# EAGLE board dual_encoder_i2c_revF (EAGLE 8.6.0)
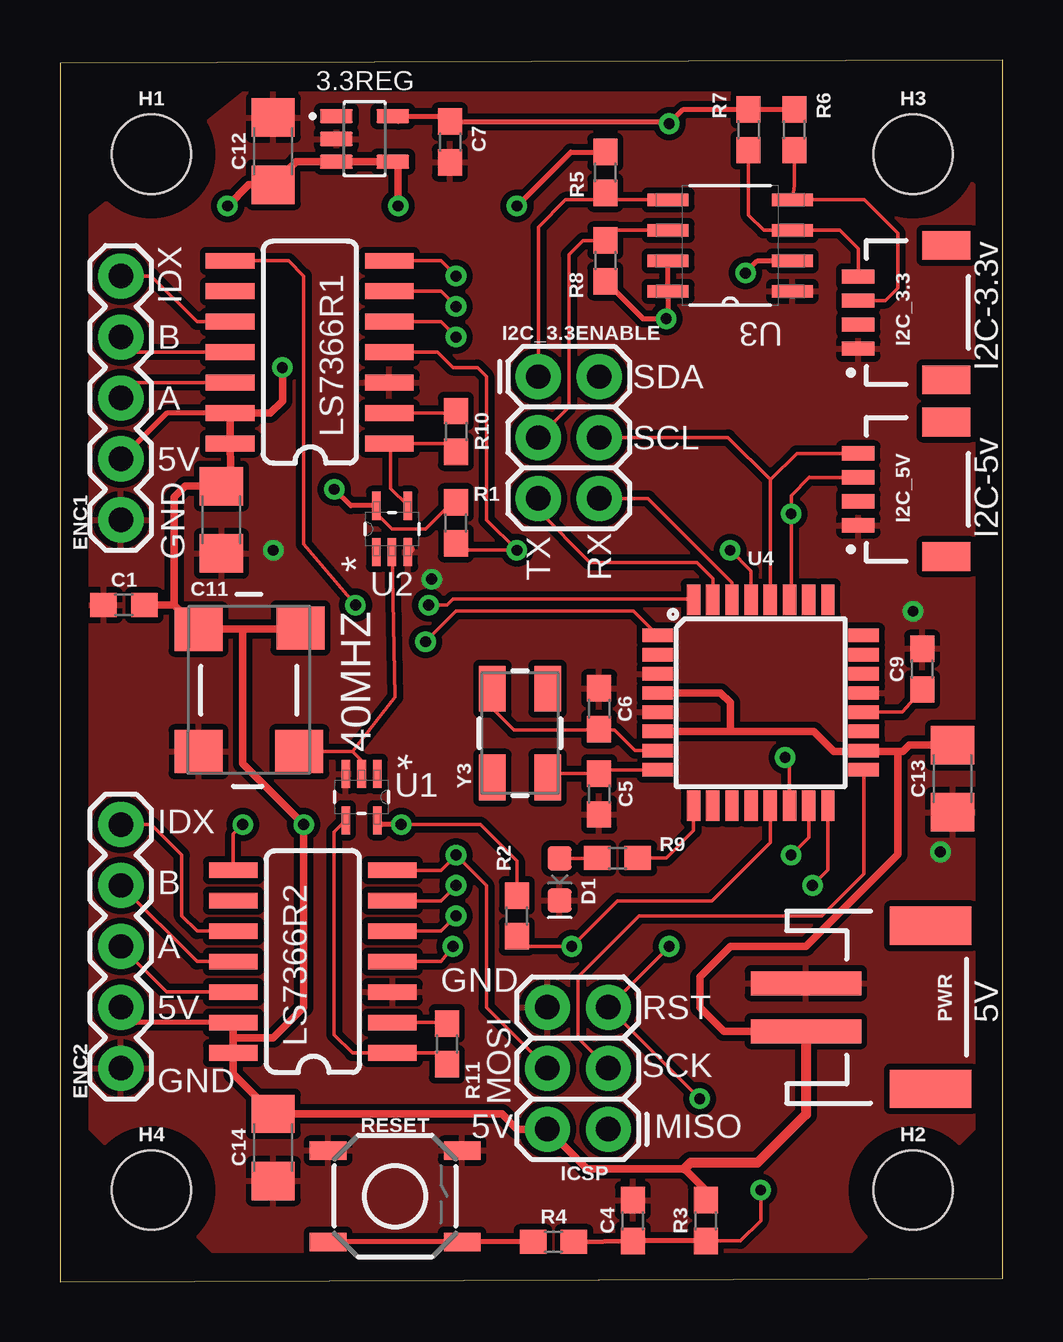
[diagram p0: board, top side]
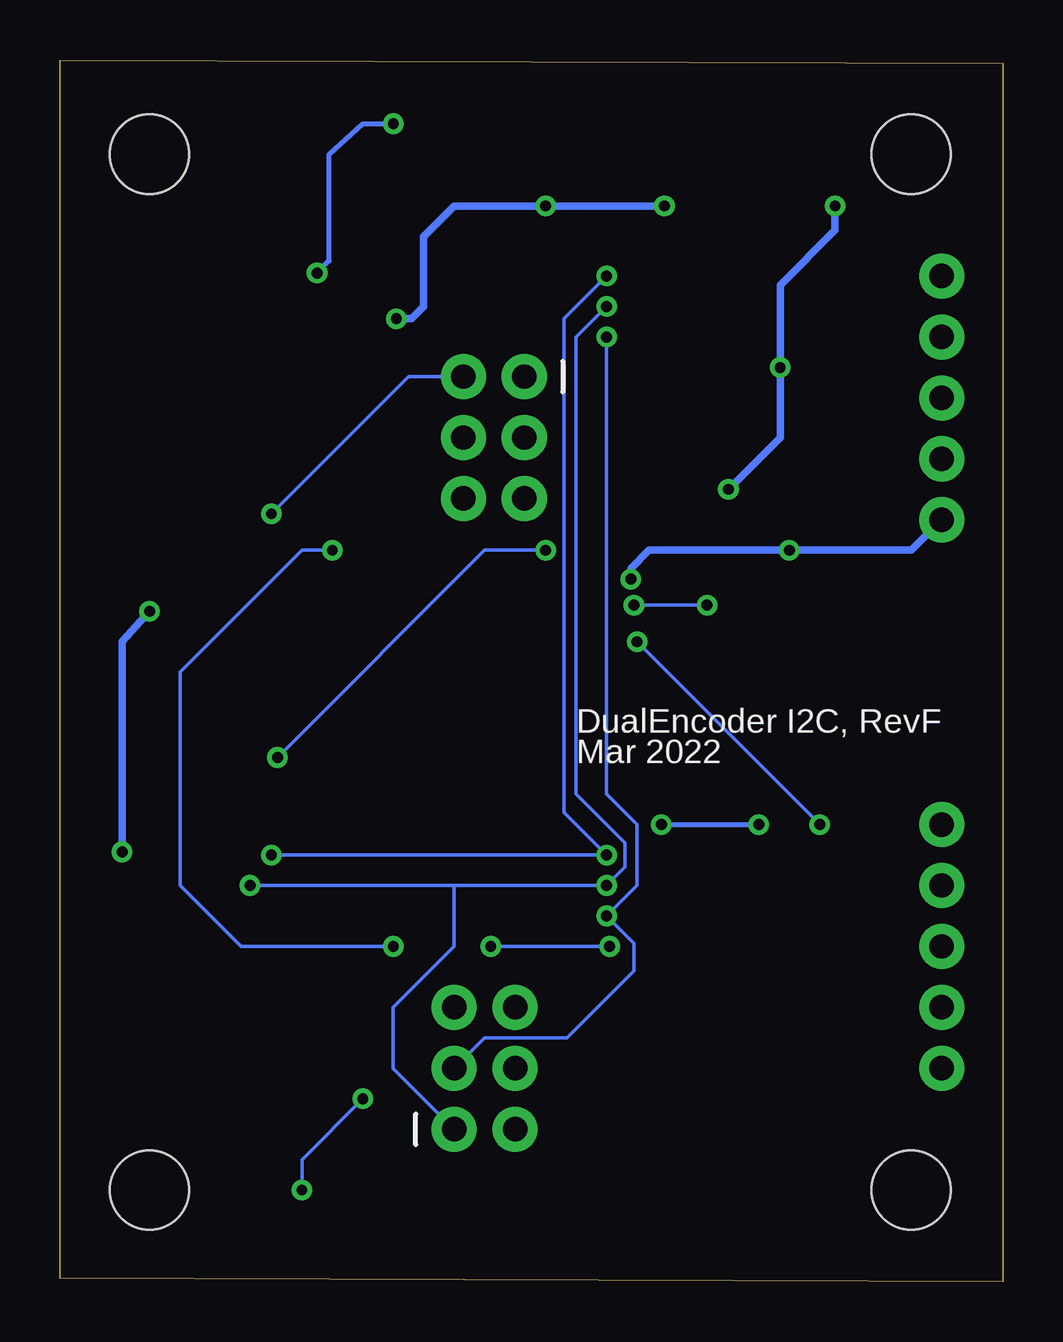
[diagram p1: board, bottom side, seen from below]

Size 39.29 x 50.92 mm. Coordinates in mm from the lower left corner, seen from the top.
Outline: 0,0 39.29,0.13 39.29,50.92 0,50.79 0,0
Copper layers (1*16): Top 0.035mm / dielectric 1.5mm / Bottom 0.035mm
Design rules "default": minimum track width 6mil, minimum drill 0.35mm, track to track 6mil, track to pad 6mil, pad to pad 6mil, via to via 6mil, smd to smd 6mil, copper to edge 40mil, drill to drill 6mil, minimum pad ring 10mil, minimum via ring 8mil, stop-mask expansion 4mil, vias tented up to drill 0mil, thermal gap 10mil

## Footprints (pad centres in the part's own frame; a part is rotated, then mirrored left to right if it is on the bottom)
SOT95P285X145-5N = smd 1.37 x 0.59: 1 -1.175,0.95; 2 -1.175,0; 3 -1.175,-0.95; 4 1.175,-0.95; 5 1.175,0.95
CB3OSCILLATOR = smd 1.8 x 2: 1 -2.55,-2.1; 2 2.55,-2.1; 3 2.55,2.1; 4 -2.6,2.15
0603 = smd 1.1 x 1: 1 -0.85,0; 2 0.85,0
1206 = smd 1.6 x 1.8: 1 -1.4,0; 2 1.4,0
LED-0603 = smd 1 x 1: A -0.877,0; C 0.877,0
1X05 = drill 1.016 pad 1.88: 1 0,0; 2 2.54,0; 3 5.08,0; 4 7.62,0; 5 10.16,0
STAND-OFF = hole 3.302: 0,0
JST04_1MM_RA = smd 0.6 x 1.35: 1 -1.5,0; 2 -0.5,0; 3 0.5,0; 4 1.5,0 | smd 1.2 x 2: NC1 2.8,-3.675; NC2 -2.8,-3.675
2X3 = drill 1.016 pad 1.88: 1 0,0; 2 0,2.54; 3 2.54,0; 4 2.54,2.54; 5 5.08,0; 6 5.08,2.54
SOIC14 = smd 2.032 x 0.66: 1 -3.315,4.445; 2 -3.315,3.175; 3 -3.315,1.905; 4 -3.315,0.635; 5 -3.315,-0.635; 6 -3.315,-1.905; 7 -3.315,-3.175; 8 3.315,-3.175; 9 3.315,-1.905; 10 3.315,-0.635; 11 3.315,0.635; 12 3.315,1.905; 13 3.315,3.175; 14 3.315,4.445
JST-2-SMD = smd 1 x 4.6: 1 -1,-3.7; 2 1,-3.7 | smd 1.6 x 3.4: NC1 -3.4,1.5; NC2 3.4,1.5
TACTILE_SWITCH_SMD_5.2MM = smd 1.524 x 0.762: 1 -2.794,1.905; 2 2.794,1.905; 3 -2.794,-1.905; 4 2.794,-1.905
SOT65P210X110-5N = smd 1.168 x 0.356: 1 -0.965,0.66; 2 -0.965,0; 3 -0.965,-0.66; 4 0.965,-0.66; 5 0.965,0.66
SOIC127P600X175-8N = smd 1.702 x 0.533: 1 -2.591,1.905; 2 -2.591,0.635; 3 -2.591,-0.635; 4 -2.591,-1.905; 5 2.591,-1.905; 6 2.591,-0.635; 7 2.591,0.635; 8 2.591,1.905
TQFP32-08 = smd 1.27 x 0.559: 1 -4.293,2.8; 2 -4.293,2; 3 -4.293,1.2; 4 -4.293,0.4; 5 -4.293,-0.4; 6 -4.293,-1.2; 7 -4.293,-2; 8 -4.293,-2.8; 17 4.293,-2.8; 18 4.293,-2; 19 4.293,-1.2; 20 4.293,-0.4; 21 4.293,0.4; 22 4.293,1.2; 23 4.293,2; 24 4.293,2.8 | smd 0.559 x 1.27: 9 -2.8,-4.293; 10 -2,-4.293; 11 -1.2,-4.293; 12 -0.4,-4.293; 13 0.4,-4.293; 14 1.2,-4.293; 15 2,-4.293; 16 2.8,-4.293; 25 2.8,4.293; 26 2,4.293; 27 1.2,4.293; 28 0.4,4.293; 29 -0.4,4.293; 30 -1.2,4.293; 31 -2,4.293; 32 -2.8,4.293
CRYSTAL-SMD-5X3.2-4PAD = smd 1.9 x 1.1: 1 -1.85,-1.15; 2 1.85,-1.15; 3 1.85,1.15; 4 -1.85,1.15

## Placement (x,y rotation side)
3.3REG  [SOT95P285X145-5N]  12.7,47.62 0 top
40MHZ  OSC  [CB3OSCILLATOR]  7.87,24.64 270 top
C1  100pF  [0603]  2.67,28.19 0 top
C4  0.1uF  [0603]  23.88,2.54 90 top
C5  22pF  [0603]  22.48,20.32 90 top
C6  22pF  [0603]  22.48,23.88 270 top
C7  2.2uF  [0603]  16.26,47.5 270 top
C9  0.1uF  [0603]  35.94,25.53 90 top
C11  4.7uF  [1206]  6.73,31.75 270 top
C12  4.7uF  [1206]  8.89,47.12 90 top
C13  4.7uF  [1206]  37.21,20.95 90 top
C14  4.7uF  [1206]  8.89,5.59 90 top
D1  LED  [LED-0603]  20.83,16.76 270 top
ENC1  [1X05]  2.54,31.75 90 top
ENC2  [1X05]  2.54,8.89 90 top
H1  STAND-OFF  [STAND-OFF]  3.81,46.99 0 top
H2  STAND-OFF  [STAND-OFF]  35.56,3.81 0 top
H3  STAND-OFF  [STAND-OFF]  35.56,46.99 0 top
H4  STAND-OFF  [STAND-OFF]  3.81,3.81 0 top
I2C_3.3  [JST04_1MM_RA]  33.27,40.39 90 top
I2C_3.3ENABLE  FEMALE 2x3  [2X3]  19.94,37.72 270 top
I2C_5V  [JST04_1MM_RA]  33.27,33.02 90 top
ICSP  FEMALE 2x3  [2X3]  22.86,6.35 90 top
LS7366R1  LS7366R  [SOIC14]  10.41,39.37 180 top
LS7366R2  LS7366R  [SOIC14]  10.54,13.97 180 top
PWR  [JST-2-SMD]  34.8,11.43 270 top
R1  1k  [0603]  16.51,31.62 90 top
R2  1k  [0603]  19.05,15.24 90 top
R3  10k  [0603]  26.92,2.54 90 top
R4  1k  [0603]  20.57,1.65 0 top
R5  2.2k  [0603]  22.73,46.23 90 top
R6  2.2k  [0603]  30.61,48.01 90 top
R7  2.2k  [0603]  28.7,48.01 270 top
R8  2.2k  [0603]  22.73,42.55 270 top
R9  1k  [0603]  23.24,17.65 180 top
R10  1M  [0603]  16.51,35.43 270 top
R11  1M  [0603]  16.13,9.91 270 top
RESET  [TACTILE_SWITCH_SMD_5.2MM]  13.97,3.56 0 top
U1  74LVC1G14GW  [SOT65P210X110-5N]  12.57,20.19 270 top
U2  74LVC1G14GW  [SOT65P210X110-5N]  13.84,31.37 90 top
U3  PCA9306D,118  [SOIC127P600X175-8N]  27.94,43.18 180 top
U4  ATMEGA328P_TQFP  [TQFP32-08]  29.21,24.13 0 top
Y3  16MHz  [CRYSTAL-SMD-5X3.2-4PAD]  19.18,22.86 90 top

## Library data of the parts
3.3REG 40MHZ = steveo
C1 = SparkFun-Capacitors; PROD_ID: CAP-07883
C4 C9 = SparkFun-Capacitors; PROD_ID: CAP-08604
C5 C6 = SparkFun-Capacitors; PROD_ID: CAP-07876
C7 = SparkFun-Capacitors; PROD_ID: CAP-07888
C11-C14 = SparkFun-Capacitors; PROD_ID: CAP-10300
D1 = SparkFun-LED
ENC1 ENC2 = SparkFun-Connectors
H1-H4 = SparkFun-Hardware
I2C_3.3 I2C_5V = SparkFun-Connectors; PROD_ID: CONN-13694
I2C_3.3ENABLE ICSP = SparkFun-Connectors; PROD_ID: CONN-11566
LS7366R1 LS7366R2 = LS7366R; AVAILABILITY: Unavailable; MF: LSI; MP: LS7366R; PACKAGE: None; PRICE: None
PWR = SparkFun-Connectors; PROD_ID: CONN-11443
R1 R2 R4 R9 = SparkFun-Resistors; PROD_ID: RES-07856
R3 = SparkFun-Resistors; PROD_ID: RES-00824
R5-R8 = SparkFun-Resistors; PROD_ID: RES-08272
R10 R11 = SparkFun-Resistors; PROD_ID: RES-07868
RESET = SparkFun-Switches; PROD_ID: SWCH-08247; SF_SKU: COM-08720
U1 U2 = 74LVC1G14GW; AVAILABILITY: Unavailable; DESCRIPTION: IC MOS 74LVC1G14/SO/74LVC1G14GW PHILIPS RoHS LVC SOt23; MF: NXP Semiconductors; MP: 74LVC1G14GW; PACKAGE: TSSOP-5 NXP Semiconductors; PRICE: 214.47 USD
U3 = PCA9306D_118; AVAILABILITY: In Stock; DESCRIPTION: Voltage Level Translator Bidirectional 1 Circuit 2 Channel - 8-SO; MF: NXP USA; MP: PCA9306D,118; PACKAGE: SO-8 NXP Semiconductors; PRICE: None; PURCHASE-URL: https://pricing.snapeda.com/search/part/PCA9306D,118/?ref=eda
U4 = SparkFun-IC-Microcontroller; PROD_ID: IC-09069
Y3 = SparkFun-Clocks; PROD_ID: XTAL-08218; SF_ID: COM-00094

## Nets
3.3_NC: I2C_3.3.2
3.3V: 3.3REG.5 C7.1 R6.2 R7.1 U3.2
5V: 3.3REG.3 3.3REG.4 40MHZ.1 40MHZ.4 C1.2 C11.1 C12.1 C13.2 C14.2 ENC1.2 ENC2.2 ICSP.2 LS7366R1.13 LS7366R1.14 LS7366R2.13 LS7366R2.14 PWR.2 R1.2 R2.2 R3.2 R5.2 R8.2 U1.5 U2.5 U3.7 U3.8 U4.4 U4.6 U4.18
5V_NC: I2C_5V.2
ENC1_A: ENC1.3 LS7366R1.12
ENC1_B: ENC1.4 LS7366R1.11
ENC1_IDX: ENC1.5 LS7366R1.10
ENC1_LFLAG: LS7366R1.8 U4.32
ENC2_A: ENC2.3 LS7366R2.12
ENC2_B: ENC2.4 LS7366R2.11
ENC2_IDX: ENC2.5 LS7366R2.10
ENC2_LFLAG: LS7366R2.8 U4.1
GND: 3.3REG.2 40MHZ.2 C1.1 C4.2 C5.1 C6.1 C7.2 C9.2 C11.2 C12.2 C13.1 C14.1 D1.C ENC1.1 ENC2.1 I2C_3.3.1 I2C_5V.1 ICSP.6 LS7366R1.3 LS7366R2.3 PWR.1 RESET.1 RESET.2 U1.3 U2.3 U3.1 U4.3 U4.5 U4.21
LED: R9.1 U4.9
MISO: ICSP.1 LS7366R1.6 LS7366R2.6 U4.16
MOSI: ICSP.4 LS7366R1.7 LS7366R2.7 U4.15
N$1: C9.1 U4.20
N$2: R4.1 RESET.3 RESET.4
N$3: D1.A R9.2
N$4: LS7366R2.2 R11.1
N$5: LS7366R1.2 R10.1
N$7: 40MHZ.3 U1.2 U2.2
N$8: LS7366R2.1 R11.2 U1.4
N$10: LS7366R1.1 R10.2 U2.4
N$12: C6.2 U4.7 Y3.3
N$13: C5.2 U4.8 Y3.1
RESET: C4.1 ICSP.5 R3.1 R4.2 U4.29
RX: I2C_3.3ENABLE.6 U4.30
SCK: ICSP.3 LS7366R1.5 LS7366R2.5 U4.17
SCL: I2C_3.3ENABLE.4 I2C_5V.4 U4.28
SCL_3.3V: I2C_3.3.4 R7.2 U3.3
SCL_5V: I2C_3.3ENABLE.3 R8.1 U3.6
SDA: I2C_3.3ENABLE.2 I2C_5V.3 U4.27
SDA_3.3V: I2C_3.3.3 R6.1 U3.4
SDA_5V: I2C_3.3ENABLE.1 R5.1 U3.5
SS_ENC1: LS7366R1.4 R1.1 U4.14
SS_ENC2: LS7366R2.4 R2.1 U4.13
TX: I2C_3.3ENABLE.5 U4.31

## Tracks (layer width: path | path; a pad name or v marks a point on that pad's centre or on a via)
3.3V  (via drill 0.45)
  Top 0.203: 14.1,48.35 3.3REG.5 16.03,48.58 C7.1 25.31,48.35 v25.4,48.26 26,48.86 R7.1 R6.2 | v28.57,42.04 29.08,42.55 U3.2
  Bottom 0.203: v28.57,42.04 28.07,42.55 28.07,46.99 26.67,48.26 v25.4,48.26
5V  (via drill 0.45)
  Top 0.152: U2.5 13.31,32.41 13.31,31.9 13.84,31.37 15.24,31.37 16.34,32.47 R1.2 | v14.22,19.05 17.53,19.05 19.05,17.53 R2.2
  Top 0.203: LS7366R2.13 3.17,10.79 ENC2.2 | LS7366R1.13 4.45,36.2 ENC1.2 | v14.22,19.05 13.41,19.05 U1.5 | U3.7 U3.8 25.35,40.21 v25.27,40.13 24.3,40.13 R8.2 | v19.05,44.83 21.3,47.08 R5.2 | U2.5 12.12,32.33 v11.43,33.02
  Top 0.305: 7.62,27.19 40MHZ.1 4.77,28.19 | 7.62,27.19 9.97,27.19 40MHZ.4 | C1.2 4.77,28.19 | LS7366R2.13 7.23,10.16 | 7.23,10.16 LS7366R2.14 7.23,8.65 C14.2 18.42,6.99 19.06,6.35 ICSP.2 21.97,4.7 26.04,4.7 26.92,3.81 R3.2 | 7.23,10.16 8.89,10.16 10.16,11.43 v10.16,19.05 7.62,21.59 7.62,27.19 | U4.6 27.94,22.93 | 27.94,22.93 31.43,22.93 32.26,22.1 33.47,22.1 | 33.47,22.1 U4.18 | U4.4 27.54,24.53 27.94,24.13 27.94,22.93 | 34.92,22.1 34.92,17.81 31.09,13.97 27.94,13.97 26.67,12.7 26.67,11.43 27.67,10.43 PWR.2 | 34.92,22.1 33.47,22.1 | v9.27,38.1 9.27,36.7 8.76,36.2 LS7366R1.13 LS7366R1.14 7.11,33.92 C11.1 5.21,33.15 4.77,32.71 4.77,28.19 | 34.92,22.1 35.14,22.1 35.4,22.36 C13.2 | v6.99,44.83 7.87,45.72 C12.1 9.85,46.67 3.3REG.3 3.3REG.4 14.1,46.45 v14.1,44.83
  Top 0.406: PWR.2 31.1,6.97 29.08,4.95 26.29,4.95 26.04,4.7
  Bottom 0.203: v14.22,19.05 v10.16,19.05
  Bottom 0.305: v11.43,33.02 9.27,35.18 v9.27,38.1 9.27,41.53 6.99,43.81 v6.99,44.83 | v14.1,44.83 v19.05,44.83 22.86,44.83 24.13,43.56 24.13,40.64 24.64,40.13 v25.27,40.13
ENC1_A
  Top 0.152: LS7366R1.12 3.17,37.47 ENC1.3
ENC1_B
  Top 0.152: LS7366R1.11 3.17,38.73 ENC1.4
ENC1_IDX
  Top 0.152: LS7366R1.10 5.71,40.01 3.81,41.91 ENC1.5
ENC1_LFLAG  (via drill 0.45)
  Top 0.152: LS7366R1.8 9.53,42.55 10.16,41.91 10.16,30.73 v12.32,28.19 | 26.26,28.57 U4.32 26.39,28.45 16.38,28.45 16.13,28.19 v15.37,28.19
  Bottom 0.152: v12.32,28.19 v15.37,28.19
ENC2_A
  Top 0.152: LS7366R2.12 4.45,12.06 ENC2.3
ENC2_B
  Top 0.152: LS7366R2.11 5.71,13.34 ENC2.4
ENC2_IDX
  Top 0.152: LS7366R2.10 5.71,14.61 5.08,15.24 5.08,17.78 3.81,19.05 ENC2.5
ENC2_LFLAG  (via drill 0.45)
  Top 0.152: LS7366R2.8 7.23,18.66 v7.62,19.05 | v15.24,26.67 16.51,27.94 23.91,27.94 U4.1
  Bottom 0.152: v7.62,19.05 v15.24,26.67
GND  (via drill 0.45)
  Top 0.305: 14.63,30.52 U2.3
  Bottom 0.305: ENC1.1 3.81,30.48 v8.89,30.48 14.73,30.48 15.49,29.72 v15.49,29.28 | v36.7,17.91 36.7,26.67 v35.56,27.94
  pour Top (isolate 0.254): 6.35,1.27 33.02,1.27 38.1,6.35 38.1,45.72 34.29,49.53 7.62,49.53 1.27,44.45 1.27,6.35
LED
  Top 0.152: 26.26,19.68 U4.9 26.41,18.8 26.42,18.8 25.27,17.65 R9.1
MISO  (via drill 0.45)
  Top 0.152: LS7366R2.6 15.88,15.88 v16.51,16.51 | LS7366R1.6 15.88,41.27 v16.51,40.64 | v31.37,16.51 32.01,17.15 U4.16
  Bottom 0.152: ICSP.1 25.4,8.89 25.4,11.43 22.86,13.97 22.86,16.51 | 22.86,16.51 v16.51,16.51 15.75,17.27 15.75,18.29 17.78,20.32 17.78,39.37 v16.51,40.64 | 22.86,16.51 v31.37,16.51
MOSI  (via drill 0.45)
  Top 0.152: LS7366R2.7 15.88,17.14 v16.51,17.78 17.78,16.51 17.78,11.43 ICSP.4 | LS7366R1.7 15.88,42.55 v16.51,41.91 | v30.48,17.78 31.21,18.51 U4.15
  Bottom 0.152: v30.48,17.78 v16.51,17.78 18.29,19.56 18.29,40.13 v16.51,41.91
N$1
  Top 0.152: U4.20 35.12,23.73 C9.1
N$2
  Top 0.203: R4.1 RESET.4 RESET.3
N$3
  Top 0.152: D1.A R9.2
N$4
  Top 0.152: LS7366R2.2 16.09,10.79 R11.1
N$5
  Top 0.152: LS7366R1.2 16.42,36.2 R10.1
N$7
  Top 0.152: 40MHZ.3 12.2,22.09 | U2.2 13.97,24.36 12.2,22.09 | U1.2 12.57,21.72 12.2,22.09
N$8
  Top 0.152: U1.4 11.43,18.75 11.43,10.29 12.19,9.53 LS7366R2.1 15.66,9.53 R11.2
N$10
  Top 0.152: U2.4 13.79,33.05 13.79,34.87 LS7366R1.1 16.17,34.92 R10.2
N$12
  Top 0.152: 24.39,22.13 U4.7 23.97,22.13 23.11,22.99 22.44,22.99 | Y3.3 18.03,23.88 18.92,22.99 22.44,22.99 | 22.44,22.99 C6.2
N$13
  Top 0.152: 24.39,21.33 U4.8 | C5.2 22.61,21.55 22.57,21.59 | 24.8,21.21 U4.8 | 20.63,21.01 Y3.1 20.49,21.17 C5.2 | U4.8 22.64,21.33 C5.2
RESET  (via drill 0.45)
  Top 0.152: v25.4,13.97 ICSP.5 v26.67,7.62 | v29.21,3.81 29.21,2.54 28.36,1.69 26.67,1.69 | U4.29 28.81,29.61 v27.94,30.48
  Top 0.203: R4.2 C4.1 26.67,1.69 R3.1
  Bottom 0.152: v25.4,13.97 31.75,13.97 34.29,16.51 34.29,25.4 29.21,30.48 v27.94,30.48 | v26.67,7.62 29.21,5.08 v29.21,3.81
RX
  Top 0.152: U4.30 28.01,29.14 24.51,32.64 I2C_3.3ENABLE.6
SCK  (via drill 0.45)
  Top 0.152: LS7366R2.5 15.88,14.61 v16.51,15.24 | LS7366R1.5 15.88,40.01 v16.51,39.37 | U4.17 33.5,16.99 31.75,15.24 24.13,15.24 21.59,12.7 21.59,10.16 ICSP.3
  Bottom 0.152: v16.51,39.37 16.51,20.32 15.24,19.05 15.24,16.51 v16.51,15.24 15.37,14.1 15.37,12.95 18.16,10.16 21.59,10.16 ICSP.3
SCL
  Top 0.152: U4.28 29.61,33.42 | I2C_5V.4 30.71,34.52 29.61,33.42 | I2C_3.3ENABLE.4 27.85,35.18 29.61,33.42
SCL_3.3V
  Top 0.152: R7.2 28.7,44.45 29.34,43.81 U3.3 32.51,43.81 33.27,43.05 I2C_3.3.4
SCL_5V
  Top 0.152: I2C_3.3ENABLE.3 21.21,36.45 21.21,42.8 21.8,43.4 R8.1 23.15,43.81 U3.6
SDA  (via drill 0.45)
  Top 0.152: U4.27 30.48,28.49 v30.48,32 30.48,32.77 31.24,33.53 31.25,33.52 I2C_5V.3
  Bottom 0.152: v30.48,32 24.77,37.72 I2C_3.3ENABLE.2
SDA_3.3V
  Top 0.152: 33.28,40.89 I2C_3.3.3 34.41,40.89 34.92,41.4 34.92,43.69 33.53,45.09 U3.4 30.61,45.67 R6.1
SDA_5V
  Top 0.152: I2C_3.3ENABLE.1 19.94,43.94 21.08,45.09 22.44,45.09 R5.1 23.03,45.09 U3.5
SS_ENC1  (via drill 0.45)
  Top 0.152: LS7366R1.4 15.75,38.73 16.38,38.1 17.4,38.1 17.78,37.72 17.78,31.75 v19.05,30.48 17.06,30.48 R1.1 | U4.14 30.41,21.66 v30.23,21.84
  Bottom 0.152: v30.23,21.84 21.59,30.48 v19.05,30.48
SS_ENC2  (via drill 0.45)
  Top 0.152: LS7366R2.4 15.88,13.34 v16.38,13.97 | U4.13 29.61,18.31 27.18,15.88 23.24,15.88 v21.34,13.97 19.47,13.97 R2.1
  Bottom 0.152: v16.38,13.97 v21.34,13.97
TX
  Top 0.152: U4.31 27.21,29.3 26.54,29.97 24.13,29.97 24,29.97 22.1,29.97 19.94,32.13 I2C_3.3ENABLE.5

## Text on the board
tPlace: IDX | B | I2C-3.3v | SDA | A | SCL | 5V | I2C-5v | GND | TX | RX | IDX | B | A | GND | 5V | RST | 5V | SCK | GND | MOSI | 5V | MISO
bPlace: DualEncoder I2C, RevF | Mar 2022